# Altium PCB RX.PcbDoc
Units mil, origin at the board's own origin, x right, y up, seen from the top; angles counter-clockwise.
Board outline 1590 x 1730 mil, 4 copper layers (Top Layer, Internal Plane 1, Signal Layer 1, Bottom Layer), stack 67.21 mil thick; 111 components, 68 nets, 346 pads, 138 vias.
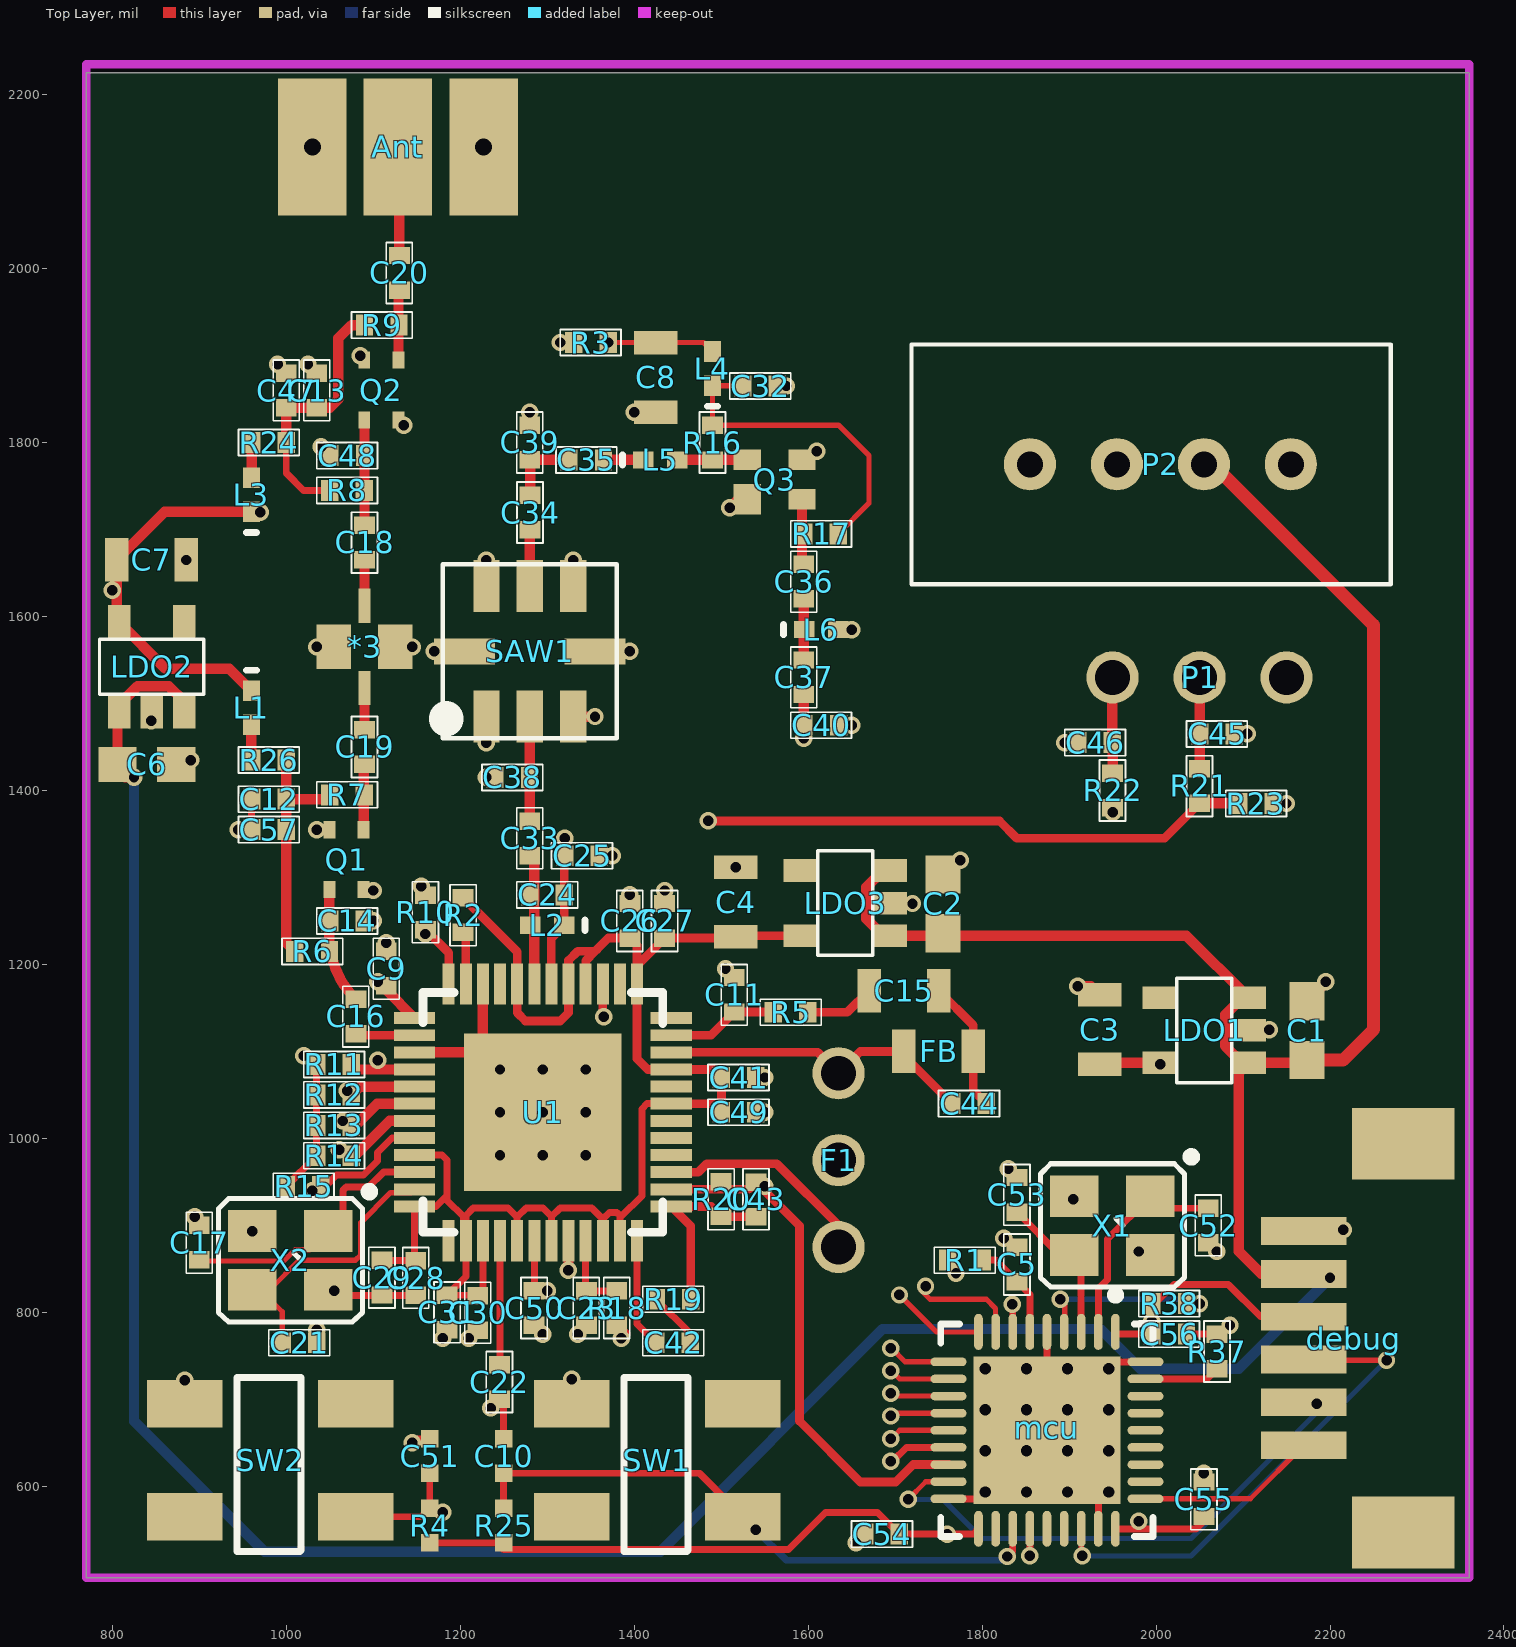
[diagram p0: Top Layer view]
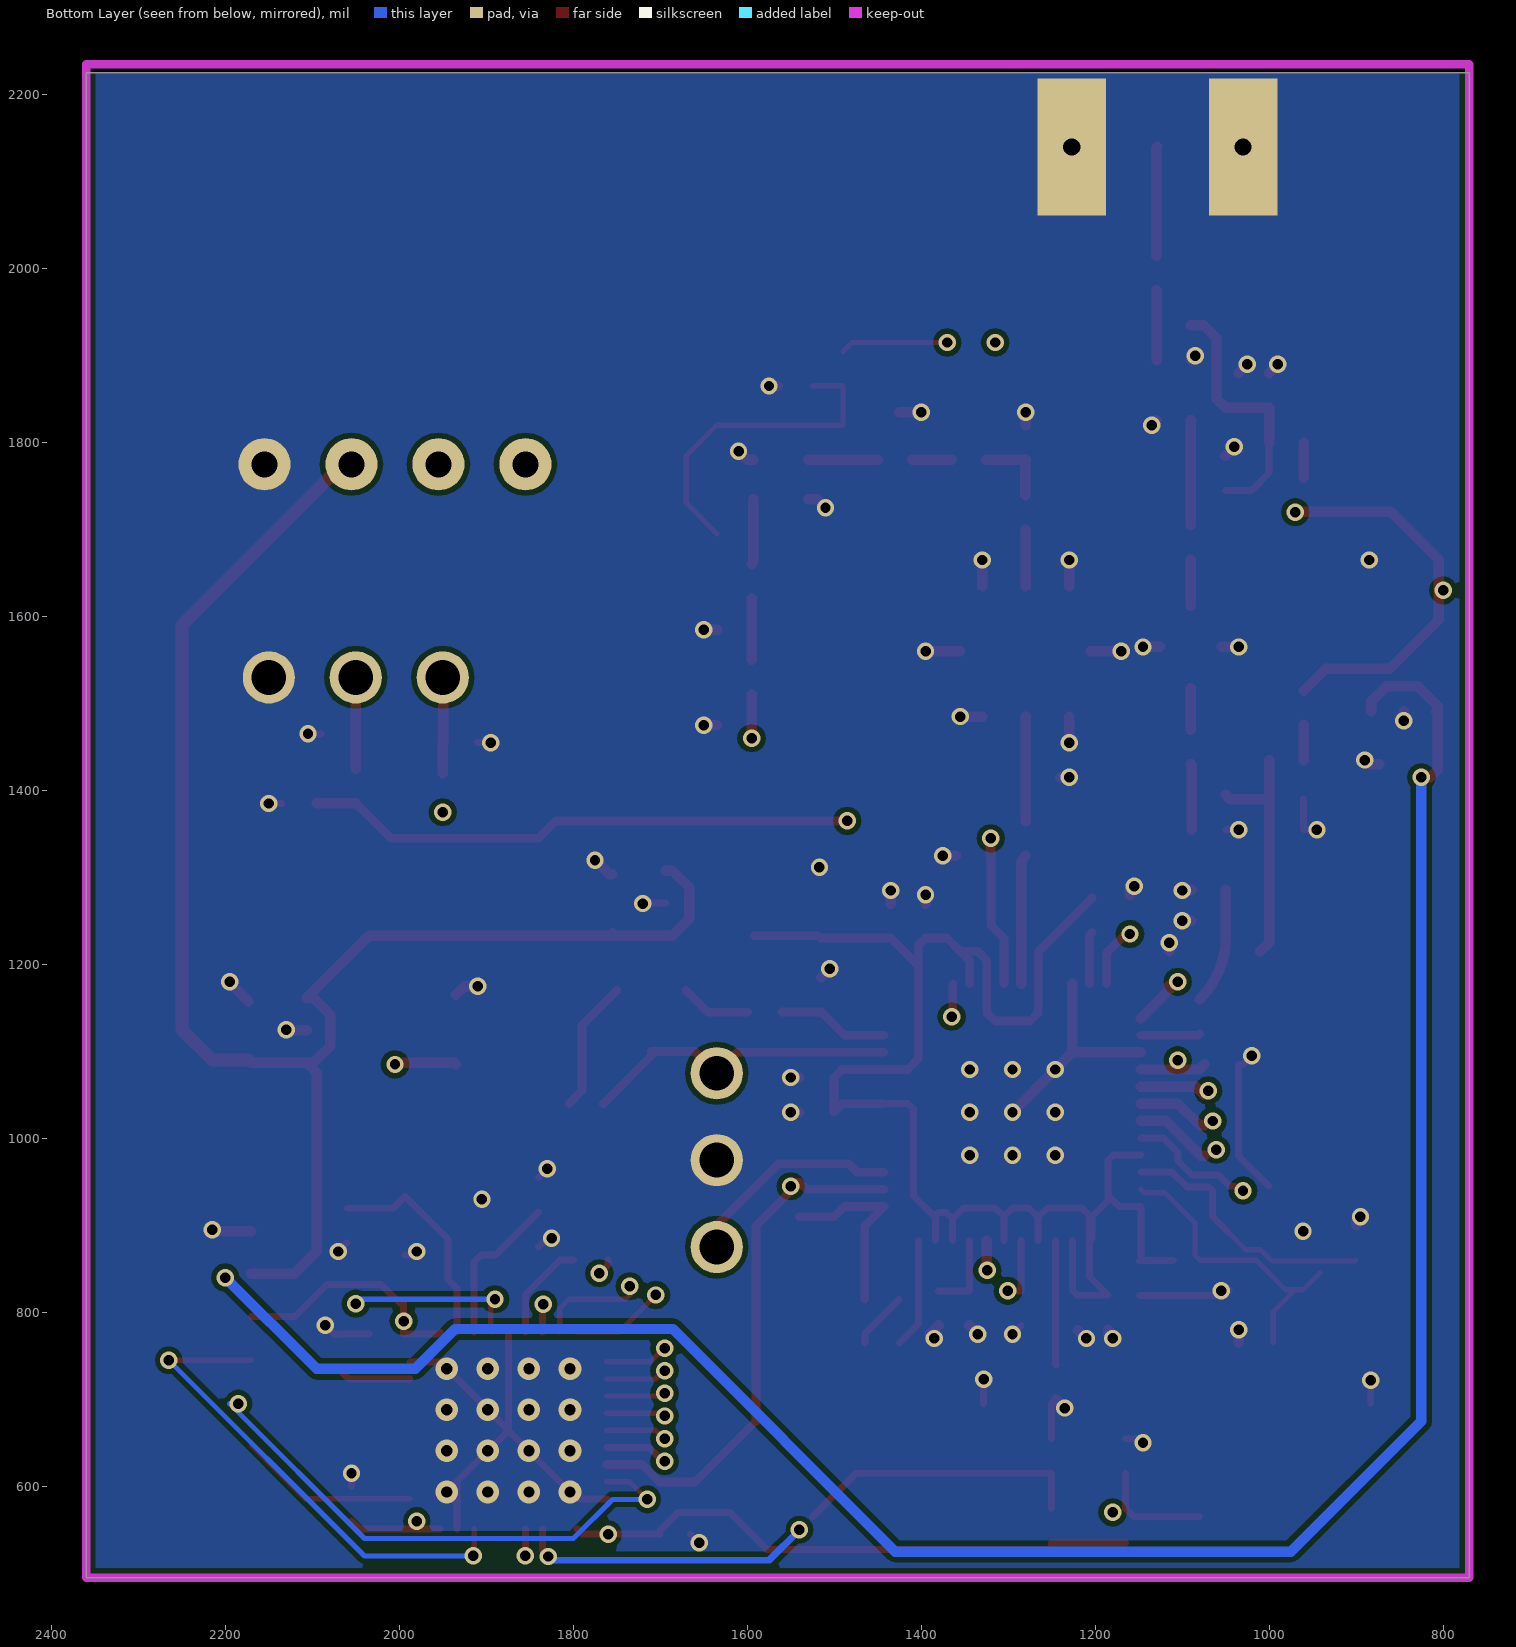
[diagram p1: Bottom Layer view, seen from below]
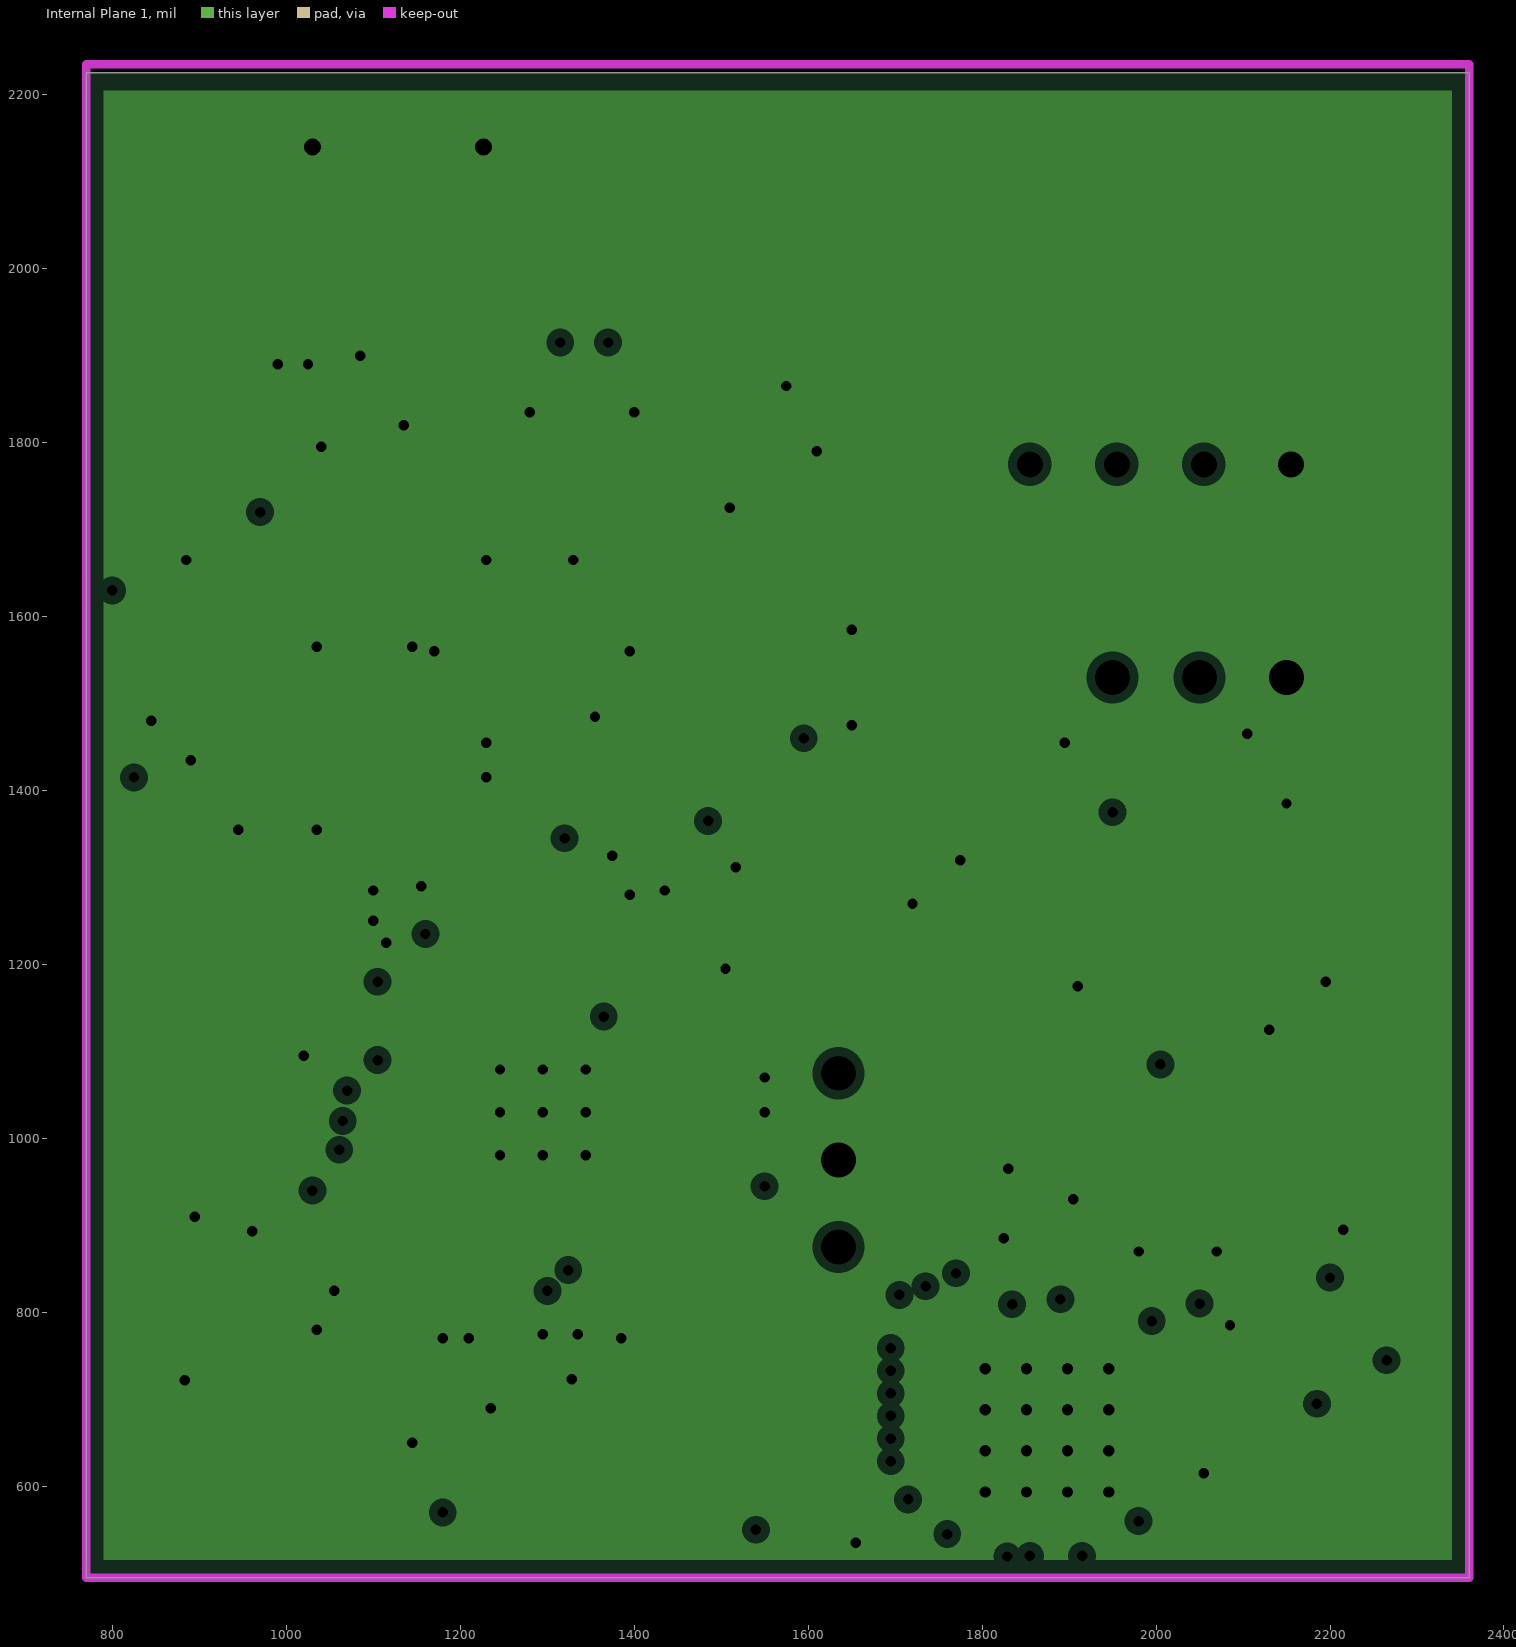
[diagram p2: Internal Plane 1, clearances drawn from the general rule]
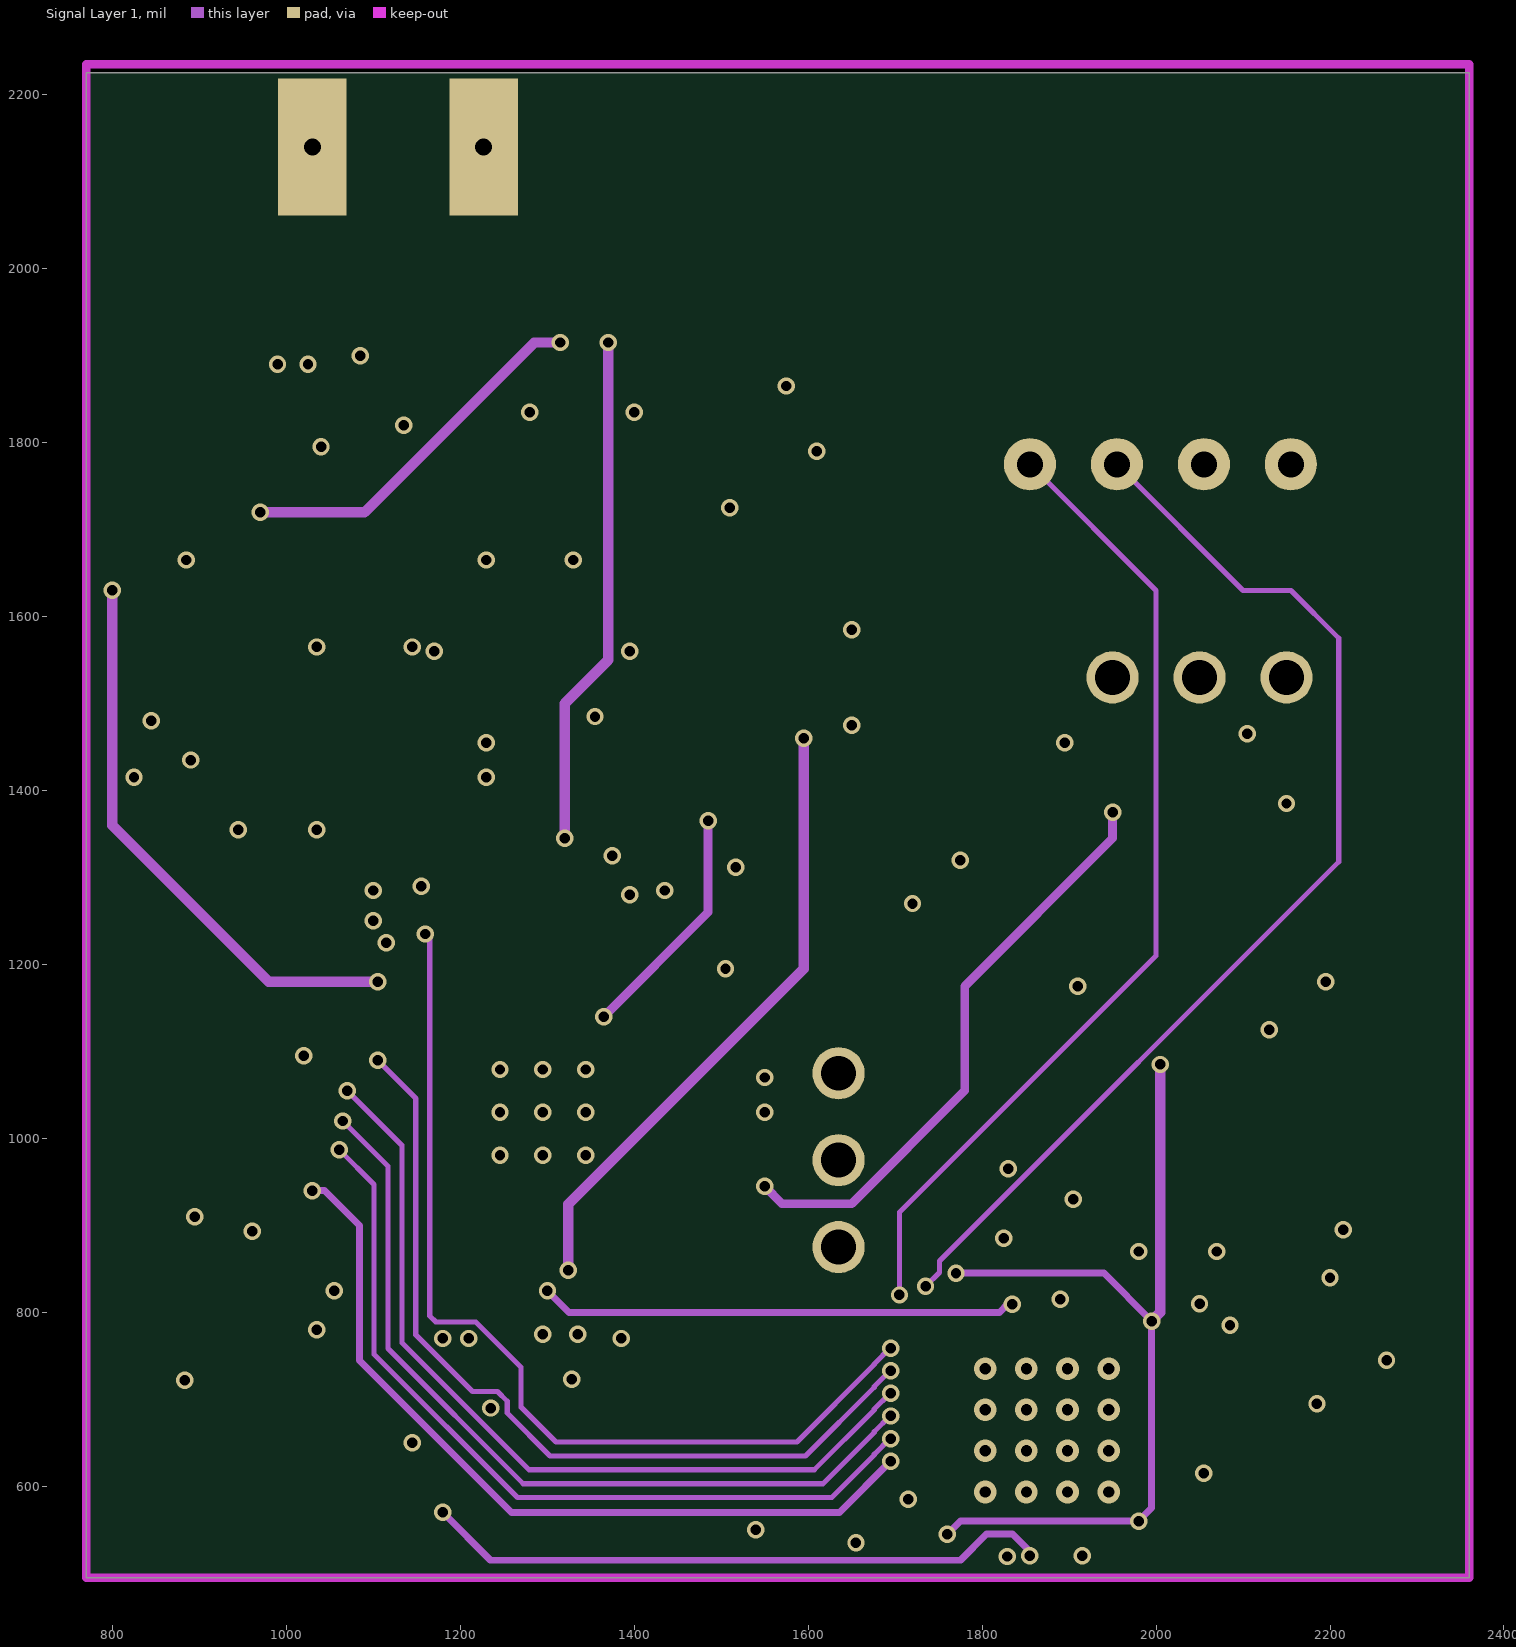
[diagram p3: Signal Layer 1]

## Layer stack, top to bottom
Top Solder: solder mask 0.4, Solder Resist, Dk 3.5
Top Layer: signal copper 1.4
Dielectric 1: core 7.874, FR-4, Dk 4.2
Internal Plane 1: plane copper 0.7087, net GND
Dielectric 3: core 47.2441, Dk 4.2
Signal Layer 1: signal copper 0.7087
Dielectric 2: core 7.874, Dk 4.2
Bottom Layer: signal copper 1.4
Bottom Solder: solder mask 0.4, Solder Resist, Dk 3.5

## Board outline
770,495 2360,495 2360,2225 770,2225

## Design rules (kind name [scope] priority, off if disabled: settings)
Clearance [All] p1: gap=6
MinimumSolderMaskSliver [All] p1 off: minsoldermaskwidth=10
PlaneClearance [All] p1: clearance=10
PlaneConnect [All] p1: planeconnectstyle=Direct reliefexpansion=20 reliefentries=4 reliefconductorwidth=10 reliefairgap=10
PolygonConnect [All] p1: connectstyle=Direct reliefconductorwidth=10 reliefentries=4 polygonreliefangle="90 Angle" airgapwidth=10
RoomDefinition RX [InComponentClass('RX')] p1 off: confinementstyle=ConfineIn formatcopy=TRUE lockcomponents=FALSE outline 4405,45 3550,45 3550,674.44 4405,674.44
RoutingVias [All] p1: holewidth=12 width=20 viastyle="Through Hole" minholewidth=12 minwidth=20 maxholewidth=28 maxwidth=50
SilkToBoardRegionClearance [All] p1 off:
SilkToSilkClearance [All] p1 off: silktosilkclearance=10
SilkToSolderMaskClearance [IsPad] p1 off: minsilkscreentomaskgap=10 clearancetoexposedcopper=TRUE
SolderMaskExpansion [All] p1: expansion=4
UnpouredPolygon [All] p1: allowunpoured=FALSE
Width [All] p1: maxlimit=60 minlimit=6 preferedwidth=10
23 further rules are at their usual default settings.

## Components (designator, comment, footprint, x,y, rotation, side; value= is the part's Value field where it differs from the comment)
*3 "BF2012" BF2012 1090,1565 r270 top
Ant "Antenna" SMA 1030,2140 r0 top
C1 "2.2uF" 0603 2173.54,1124.17 r270 top
C2 "2.2uF" 0603 1755,1270 r270 top
C3 "4.7uF" 0805 1935,1125 r270 top
C4 "4.7uF" 0805 1516.96,1271.56 r270 top
C5 "Cap" 0402#1 1840,855 r90 top
C6 "2.2uF" 0603 840,1430 r180 top
C7 "4.7uF" 0805 845,1665 r180 top
C8 "4.7uF" 0805 1425,1875 r90 top
C9 "0.1uF" 0402#1 1115,1195 r90 top
C10 "1nF" 0402#2 1250,635 r270 top
C11 "27pF" 0402#1 1515,1165 r90 top
C12 "10pF" 0402#1 980,1390 r0 top
C13 "10pF" 0402#1 1035,1860 r270 top
C14 "1pF" 0402#1 1070,1250 r180 top
C15 "TBD" 0805 1710,1170 r180 top
C16 "1pF" 0402#1 1080,1140 r90 top
C17 "Cap" 0402#1 900,880 r90 top
C18 "1pF" 0402#1 1090,1685 r90 top
C19 "0.5pF" 0402#1 1090,1450 r90 top
C20 "0.5pF" 0402#1 1130,1995 r90 top
C21 "Cap" 0402#1 1015,765 r0 top
C22 "Cap" 0402#1 1245,720 r270 top
C23 "Cap" 0402#1 1345,805 r270 top
C24 "1pF" 0402#1 1300,1280 r180 top
C25 "47pF" 0402#1 1340,1325 r0 top
C26 "10nF" 0402#1 1395,1250 r90 top
C27 "0.1uF" 0402#1 1435,1250 r90 top
C28 "Cap" 0402#1 1148.95,839.57 r270 top
C29 "Cap" 0402#1 1110,840 r270 top
C30 "0.1uF" 0402#1 1220.18,799.57 r270 top
C31 "10nF" 0402#1 1185,800 r270 top
C32 "100pF" 0402#1 1545,1865 r180 top
C33 "0R/TBD" 0402#1 1280,1345 r270 top
C34 "0R/TBD" 0402#1 1280.29,1719.57 r270 top
C35 "6.8pF" 0402#1 1345,1780 r180 top
C36 "100pF" 0402#1 1595,1640 r90 top
C37 "8pF" 0402#1 1595,1530 r90 top
C38 "NC/TBD" 0402#1 1260,1415 r180 top
C39 "NC/TBD" 0402#1 1280,1800 r90 top
C40 "?pF" 0402#1 1615,1475 r0 top
C41 "0.1uF" 0402#1 1520,1070 r0 top
C42 "TBD" 0402#1 1445,765 r180 top
C43 "TBD" 0402#1 1540,930 r270 top
C44 "TBD" 0402#1 1785,1040 r0 top
C45 "27pF/NC" 0402#1 2070,1465 r0 top
C46 "NC/TBD" 0402#1 1930,1455 r180 top
C47 "1nF" 0402#1 1000,1860 r270 top
C48 "1pF" 0402#1 1070,1785 r0 top
C49 "0.1uF" 0402#1 1520,1030 r0 top
C50 "Cap" 0402#1 1285,805 r270 top
C51 "1nF" 0402#2 1165,635 r270 top
C52 "Cap" 0402#1 2060,900 r270 top
C53 "Cap" 0402#1 1840,935 r90 top
C54 "Cap" 0402#1 1685,545 r180 top
C55 "Cap" 0402#1 2055,585 r90 top
C56 "Cap" 0402#1 2015,775 r0 top
C57 "1nF" 0402#1 980,1355 r0 top
debug "debug" WFRSM125 2170,795 r90 top
F1 "6M/6.5M_Audio_filter" 3p 1635,1075 r270 top
FB "TBD" 0805 1750,1100 r180 top
L1 "10nH" 0402-A 960,1495 r270 top
L2 "10nH" 0402-A 1300,1245 r180 top
L3 "10nH" 0402-A 960,1740 r90 top
L4 "RFchoke" 0402-A 1490,1885 r90 top
L5 "39nH" 0402-A 1430,1780 r0 top
L6 "18nH" 0402-A 1615,1585 r0 top
LDO1 "RT9193-33" SOT23-5 2055.43,1124.17 r90 top
LDO2 "LP5907" SOT23-5 845.26,1542.31 r0 top
LDO3 "LP5907/RT9013" SOT23-5 1642.69,1270.54 r90 top
mcu "STM32F103T8U6" VFQN36_N 1874.61,664.37 r270 top
P1 "3P" 3p 1950,1530 r0 top
P2 "4PSocket" 4pSocket 1955,1775 r0 top
Q1 "NPN" NESG3031M05 1030,1345 r270 top
Q2 "NPN" NESG3031M05 1070,1885 r270 top
Q3 "RF_BJT" SOT343-4(RF) 1530,1780 r270 top
R1 "0R" 0402#1 1780,860 r0 top
R2 "NC/0R" 0402#1 1203.35,1256.59 r90 top
R3 "FB" 0402#1 1350,1915 r0 top
R4 "510R" 0402#2 1165,555 r270 top
R5 "2k" 0402#1 1580,1145 r180 top
R6 "68R" 0402#1 1030,1215 r180 top
R7 "39k" 0402#1 1070,1395 r180 top
R8 "68R" 0402#1 1070,1745 r180 top
R9 "39k" 0402#1 1110,1935 r180 top
R10 "10k" 0402#1 1160,1260 r270 top
R11 "10k" 0402#1 1055,1085 r180 top
R12 "10k" 0402#1 1055,1050 r180 top
R13 "10k" 0402#1 1055,1015 r180 top
R14 "10k" 0402#1 1055,980 r180 top
R15 "10k" 0402#1 1020,945 r180 top
R16 "33k" 0402#1 1490,1800 r270 top
R17 "100R" 0402#1 1615,1695 r180 top
R18 "12k" 0402#1 1380,805 r270 top
R19 "0R/TBD" 0402#1 1445,815 r0 top
R20 "0R/TBD" 0402#1 1500,930 r90 top
R21 "10R" 0402#1 2050,1405 r90 top
R22 "0R/TBD" 0402#1 1950,1400 r90 top
R23 "75R" 0402#1 2115,1385 r180 top
R24 "510R" 0402#1 980,1800 r0 top
R25 "510R" 0402#2 1250,555 r270 top
R26 "510R" 0402#1 980,1435 r0 top
R37 "Res2" 0402#1 2070,755 r270 top
R38 "Res2" 0402#1 2015,810 r0 top
SAW1 "NDF4010" QCC-8 1280,1560 r90 top
SW1 "SW-PB" SW1 1525,565 r180 top
SW2 "SW-PB" SW1 1080,565 r180 top
U1 "RTC6715" RTC6715 1295,1030 r0 top
X1 "24.000 KHz 3.2x2.5mm 8-10pf" OSCILLATOR-3.2X2.5 1950,900 r180 top
X2 "24.000 KHz 3.2x2.5mm 8-10pf" OSCILLATOR-3.2X2.5 1005,860 r180 top

## Footprints (in the part's own frame and the unit in brackets; to place one, negate y for a bottom-side part, rotate by r counter-clockwise, add the part's x,y. Pads: shape width x height; smd on the part's side, far side on the other; paste and mask are expansions set on the pad)
3p [mil]
  round 60 hole 40: 1(0,0) 2(100,0) 3(200,0)
4pSocket [mil]
  round 60 hole 30: 1(-100,0) 2(0,0) 3(100,0) 4(200,0)
  silkscreen extent -236,-138 315,138
0402#1 [mil] "0402-CAP"
  rect 20x24 smd: 1(20,0) 2(-19.69,0)
  silkscreen extent -35,-15 35,15
0402#2 [mil] "0402-RES"
  rect 20x20 smd: 1(-19.69,0) 2(20,0)
0402-A [mm] "Chip Inductor, Body 1.0x0.5mm, IPC High Density"
  rect 0.6x0.5 smd: 1(-0.5,0) 2(0.5,0)
  silkscreen extent -1.1,-0.15 -1.1,0.15, body extent -0.55,-0.3 0.55,0.3, height 0.55
0603 [mil] "0603"
  rect 44x40 smd: 1(-33.46,0) 2(34,0)
0805 [mil]
  rect 27x50 smd: 1(-40,0) 2(40,0)
  body extent -50,-30 50,30, height 31
BF2012 [mm]
  rect 1.3x1 smd: 0(0,0.9) 0(0,-0.9)
  rect 1x0.35 smd: 1(-1.2,0) 2(1.2,0)
NESG3031M05 [mm]
  rect 0.5x0.35 smd: 1(-0.25,1.5) 2(-0.25,0.5) 2(1.5,1.5) 3(1.5,0.5)
  body extent 0,0 1.25,2, height 0.6
OSCILLATOR-3.2X2.5 [mil] "OSCILLATOR-3.2X2.5"
  rect 56x48 smd: 1(-43.31,-33.46) 2(44,-33.46) 3(44,34) 4(-43.31,34)
  silkscreen extent -95,-83 83,71
QCC-8 [mil]
  rect 60x30 smd: 1(-75,50) 2(-75,0) 3(-75,-50) 5(75,-50) 6(75,0) 7(75,50)
  rect 30x70 smd: 4(0,-75) 8(0,75)
  silkscreen extent -100,-100 100,100, body extent -100,-100 100,100, height 80
RTC6715 [mm]
  rect 4.6x4.6 smd: 0(0,0)
  rect 1.2x0.35 smd: 1(-3.75,2.75) 2(-3.75,2.25) 3(-3.75,1.75) 4(-3.75,1.25) 5(-3.75,0.75) 6(-3.75,0.25) 7(-3.75,-0.25) 8(-3.75,-0.75) 9(-3.75,-1.25) 10(-3.75,-1.75) 11(-3.75,-2.25) 12(-3.75,-2.75) 25(3.75,-2.75) 26(3.75,-2.25) 27(3.75,-1.75) 28(3.75,-1.25) 29(3.75,-0.75) 30(3.75,-0.25) 31(3.75,0.25) 32(3.75,0.75) 33(3.75,1.25) 34(3.75,1.75) 35(3.75,2.25) 36(3.75,2.75)
  rect 0.35x1.2 smd: 13(-2.75,-3.75) 14(-2.25,-3.75) 15(-1.75,-3.75) 16(-1.25,-3.75) 17(-0.75,-3.75) 18(-0.25,-3.75) 19(0.25,-3.75) 20(0.75,-3.75) 21(1.25,-3.75) 22(1.75,-3.75) 23(2.25,-3.75) 24(2.75,-3.75) 37(2.75,3.75) 38(2.25,3.75) 39(1.75,3.75) 40(1.25,3.75) 41(0.75,3.75) 42(0.25,3.75) 43(-0.25,3.75) 44(-0.75,3.75) 45(-1.25,3.75) 46(-1.75,3.75) 47(-2.25,3.75) 48(-2.75,3.75)
  silkscreen extent -3.5,-3.5 3.5,3.5, body extent -3.5,-3.5 3.5,3.5, height 0.9
SMA [mm]
  rect 2x4 smd: 1(2.5,0)
  rect 2x4 hole 0.5: GND(0,0) GND(5,0)
SOT23-5 [mil]
  rect 26x40 smd: 1(-37.4,-51) 2(0,-51) 3(37.4,-51) 4(37.4,51) 5(-37.4,51)
  silkscreen extent -60,-32 60,32
SOT343-4(RF) [mm]
  rect 0.6x0.8 smd: 1(0,0) 3(1.15,1.6) 4(0,1.6)
  rect 0.9x0.8 smd: 2(1.15,0)
SW1 [mm]
  rect 2.2x1.4 smd: 1(0,0) 2(5,-3.3) 3(5,0) 4(0,-3.3)
  silkscreen extent 1.6,-4.06 3.47,1.02
VFQN36_N [mm]
  rect 4.3x4.3 smd: 0(0,0)
  oval 1.05x0.25 smd: 1(-2.875,2) 2(-2.875,1.5) 3(-2.875,1) 4(-2.875,0.5) 5(-2.875,0) 6(-2.875,-0.5) 7(-2.875,-1) 8(-2.875,-1.5) 9(-2.875,-2) 19(2.875,-2) 20(2.875,-1.5) 21(2.875,-1) 22(2.875,-0.5) 23(2.875,0) 24(2.875,0.5) 25(2.875,1) 26(2.875,1.5) 27(2.875,2)
  oval 0.25x1.05 smd: 10(-2,-2.875) 11(-1.5,-2.875) 12(-1,-2.875) 13(-0.5,-2.875) 14(0,-2.875) 15(0.5,-2.875) 16(1,-2.875) 17(1.5,-2.875) 18(2,-2.875) 28(2,2.875) 29(1.5,2.875) 30(1,2.875) 31(0.5,2.875) 32(0,2.875) 33(-0.5,2.875) 34(-1,2.875) 35(-1.5,2.875) 36(-2,2.875)
  silkscreen extent -4.07,-3.1 3.1,3.1
WFRSM125 [mm]
  rect 0.81x2.5 smd: 1(-3.75,0) 2(-2.5,0) 3(-1.25,0) 4(0,0) 5(1.25,0) 6(2.5,0)
  rect 2.1x3 smd: shell(-6.3,-2.9) shell(5.05,-2.9)
  body extent -6.79,-3.82 5.46,0.38, height 3.4

## Part data
C1 C2 C3 C4 C6 C7 C8 C9 C10 C11 C12 C13 C14 C15 C16 C18 C19 C20 C24 C25 C26 C27 C30 C31 C32 C33 C34 C35 C36 C37 C38 C39 C40 C41 C42 C43 C44 C45 C46 C47 C48 C49 C51 C57: library part Cap, "Capacitor"
C5 C17 C21 C22 C23 C28 C29 C50 C52 C53 C54 C55 C56: "Capacitor"
FB R1 R2 R3 R4 R5 R6 R7 R8 R9 R10 R11 R12 R13 R14 R15 R16 R17 R18 R19 R20 R21 R22 R23 R24 R25 R26: library part Res2, "Resistor"
L1 L2 L3 L4 L5 L6: library part Inductor, "Inductor"
LDO1 LDO3: library part LP5907
mcu: "STM32 ARM-based 32-bit MCU with 64 Kbytes Flash, 36-pin VFQFPN, Industrial Temperature"
Q1 Q2: "NPN Bipolar Transistor"
R37 R38: "Resistor"
SW1 SW2: "Switch"
X1 X2: library part OSCILLATOR-3.2X2.5, "Crystal Oscillator in 3.2x2.5 SMD"

## Via types
v1: diameter 20, hole 12, Top Layer to Bottom Layer, 122 vias
v2: diameter 25.98, hole 12.99, Top Layer to Bottom Layer, tented both sides, 16 vias

## Nets (pads, with @x,y where several pads share a name; then routed paths per layer and width w, separated by ;. In a path a pad name is that pad's centre, name@x,y a point inside that pad or via, vN(x,y) a via of type N, cw(c..) or ccw(c..) an arc to the next point about the centre after c; other vN are vias at no path point)
3.3A: C4.2 C26.2 C27.2 C28.2 C29.2 C30.2 C31.2 C41.2 C49.2 LDO3.5 R2.1 U1.9 U1.12 U1.14 U1.15 U1.17 U1.19 U1.22 U1.23 U1.31 U1.33 U1.37 U1.40 U1.41 U1.44 | length 1938.9
  Top Layer w8: C29.2 C28.2@1148.53,859.69 ; U1.9 1179.21,980.79 1185,975 1185,934.4 ; C28.2 C28.2@1148.53,859.69 ; U1.15 1226.1,825.19 C30.2 1219.75,819.69 C31.2 1206.42,841.1 U1.14 ; U1.17 1265.47,909.53 ; U1.19 1304.84,909.84 1305,910 ; U1.22 1363.9,907.33 ; U1.23 1383.58,908.58 1385,910 ; U1.31 1442.48,1040 1415,1040 1409.02,1034.02 1409.02,934.02 1385,910 ; C28.2@1148.53,859.69 1147.36,860.85 U1.12 1172.33,921.73 1185,934.4 ; 1185,934.4 1185,928.75 1203.62,910.13 1203.62,885.16 U1.14 ; U1.14 1206.42,911.42 1215,920 1255,920 1265.47,909.53 ; 1265.47,909.53 1275.94,920 1295,920 1305,910 ; 1305,910 1315,920 1351.23,920 1363.9,907.33 ; 1363.9,907.33 1371.57,915 1380,915 1385,910
  Top Layer w10: R2.1 1265.47,1214.47 U1.44 1265.47,1144.53 1275,1135 1315,1135 1324.53,1144.53 U1.41 1324.53,1204.53 1335,1215 1355,1215 ; U1.40 1344.21,1204.21 1355,1215 ; 1357.26,1217.26 1355,1215 ; U1.31 1490.47,1039.84 C49.2 C41.2 1491.1,1079.21 U1.33 1415.79,1079.21 1403.27,1091.73 U1.37 U1.37@1403.27,1198.58 ; LDO3.5 1518.54,1233.14 C4.2 1515.72,1230.31 C27.2 U1.37@1403.27,1198.58 ; 1355,1215 1370.31,1230.31 C26.2 1403.27,1222.05 U1.37@1403.27,1198.58
3.3D: C3.2 C54.2 C55.2 C56.2 debug.4 LDO1.5 mcu.1 mcu.19 mcu.27 R1.2 R4.2 R25.2 R38.2 | length 2156.6
  Top Layer w8: R4.2 R25.2 1250,527.44 1577.44,527.44 1620,570 1679.69,570 C54.2@1704.37,545.31 ; C54.2@1700,545.31 C54.2@1704.37,545.31 ; C54.2 C54.2@1704.37,545.31 ; R1.2 1760.31,854.69 v1(1770,845) ; mcu.19 1790,545.31 C54.2@1704.37,545.31 ; mcu.27 2045.87,551.18 C55.2@2055,560.31 ; mcu.1 1955.91,775 C56.2 R38.2 1998.86,810 2020.86,832 2083,832 2120,795 debug.4
  Top Layer w12: C3.2 1936.77,1086.77 LDO1.5 2004.43,1085.57 v1(2005,1085)
  Signal Layer 1 w8: v1(1760,545) 1775,560 v1(1980,560) 1995,575 v1(1995,790) 1940,845 v1(1770,845)
  Signal Layer 1 w12: v1(1995,790) 2005,800 v1(2005,1085)
3.3IF: C8.2 C24.2 C25.2 L2.1 L4.2 R3.1 U1.42 | length 888.9
  Top Layer w6: v1(1370,1915) C8.2 1479.69,1915 L4.2
  Top Layer w10: U1.42 1304.84,1230.16 L2.1 C24.2 1319.69,1324.37 C25.2
  Top Layer w12: v1(1320,1345) 1320.31,1344.69 C25.2
  Signal Layer 1 w12: v1(1320,1345) 1320,1500 1370,1550 v1(1370,1915)
3.3RF: C7.2 C9.2 L1.1 L3.1 LDO2.5 R3.2 U1.1 | length 1583.3
  Top Layer w12: L1.1 934.69,1540 861.18,1540 LDO2.5 805,1596.18 C7.2 860.32,1720.31 L3.1 969.69,1720.31 v1(970,1720) ; v1(1105,1180) 1109.69,1175.31 C9.2 1115,1170.63 U1.1
  Signal Layer 1 w12: v1(800,1630) 800,1360 980,1180 v1(1105,1180) ; v1(970,1720) 1090,1720 1285,1915 v1(1315,1915)
5V: C1.2 C2.2 C6.2 debug.5 LDO1.1 LDO1.3 LDO2.1 LDO2.3 LDO3.1 LDO3.3 P2.3 | length 4410.3
  Top Layer w12: LDO2.1 LDO2.1@806,1489.45 ; v1(825,1415) 815,1415 806,1424 C6.2 LDO2.1@806,1489.45 ; LDO2.3 882.66,1502.34 865,1520 828.98,1520 806,1497.02 LDO2.1@806,1489.45 ; LDO3.3 1686.11,1307.94 1666.69,1288.51 1666.69,1252.57 1686.11,1233.14 LDO3.1 C2.2@1752.14,1233.14 ; C2.2 C2.2@1752.14,1233.14 ; debug.5 2120.79,844.21 2095,870 2095,1075.34 LDO1.1 ; C1.2 2170.14,1086.77 LDO1.1 ; C2.2@1752.14,1233.14 2034.87,1233.14 LDO1.3 2098.86,1161.57 2079.43,1142.14 2079.43,1106.2 2098.86,1086.77 LDO1.1
  Top Layer w15: P2.3 2065,1775 2250,1590 2250,1125 2215.17,1090.17 C1.2
  Bottom Layer w12: v1(825,1415) 825,675 975,525 1429.99,525 1685.89,780.9 1935.9,780.9 1981.8,735 2095,735 v1(2200,840)
AIN6: C43.1 R19.1 R20.2 U1.25 | length 218.2
  Top Layer w10: R19.1 1465,899.37 U1.25 1488.58,921.73 R20.2 1500.31,910 C43.1
AIN65: U1.29
AOUT6: C43.2 mcu.16 R20.1 R22.2 U1.26 | length 1299.4
  Top Layer w10: U1.26 1531.73,941.42 C43.2 ; v1(1550,945) 1545.31,949.69 C43.2 ; mcu.16 1720.8,625 1700.8,605 1660,605 1590,675 1590,899.69 C43.2
  Signal Layer 1 w10: v1(1550,945) 1570,925 1650,925 1780,1055 1780,1175 1950,1345 v1(1950,1375)
AOUT65: U1.28
BBOUT: C44.2 F1.1 FB.2 U1.34 | length 370.5
  Top Layer w10: U1.34 1611.1,1098.9 F1.1 1660,1100 FB.2 1710,1095.31 C44.2
BX: mcu.15 R15.2 U1.8 | length 1142.8
  Top Layer w8: R15.2 1045,945 1058,958 1088.83,958 1105,974.17 1105,983.72 1121.76,1000.47 U1.8 ; v1(1695,628.9) 1697.28,628.9 1713.07,644.69 mcu.15
  Signal Layer 1 w8: v1(1030,940) 1044,940 1084,900 1084,744.83 1258.83,570 1636.1,570 v1(1695,628.9)
FM6: F1.3 U1.27 | length 250.9
  Top Layer w10: U1.27 1473.55,961.1 1483.44,971 1564,971 1635,900 F1.3
FM65: U1.32
GND: *3.0 Ant.GND C1.1 C2.1 C3.1 C4.1 C5.1 C6.1 C7.1 C8.1 C9.1 C10.1 C11.1 C12.2 C13.2 C14.2 C17.1 C21.1 C22.1 C23.1 C25.1 C26.1 C27.1 C28.1 C29.1 C30.1 C31.1 C32.2 C38.1 C39.1 C40.1 C41.1 C45.1 C46.1 C47.2 C48.2 C49.1 C50.1 C51.1 C52.1 C53.1 C54.1 C55.1 C56.1 C57.2 debug.6 F1.2 L6.2 LDO1.2 LDO2.2 LDO3.2 mcu.0 mcu.5 mcu.18 mcu.26 mcu.36 P1.3 P2.4 Q1.2 Q2.2 Q3.2 Q3.4 R10.2 R11.1 R12.1 R13.1 R14.1 R15.1 R18.1 R23.2 R37.2 SAW1.1 SAW1.3 SAW1.4 SAW1.5 SAW1.7 SAW1.8 SW1.2 SW2.2 U1.0 U1.3 U1.46 X1.2 X1.4 X2.2 X2.4 | length 2328.9
  Top Layer w8: SW2.2 v1(883.15,721.85) ; v1(945,1355) C57.2 C12.2 ; R15.1 R14.1 R13.1 R12.1 R11.1 1030,1085 v1(1020,1095) ; v1(1035,1355) 1049.53,1355 Q1.2@1049.69,1354.84 ; X2.4@1054,826 v1(1055,825) 1060.42,819.58 C28.1 ; v1(1145,650) 1149.69,654.69 C51.1 ; C10.1 C22.1@1250,695 ; C50.1 v1(1295,775) ; SW1.2 v1(1328.15,723.15) ; v1(1655,535) C54.1 ; LDO3.2 1719.46,1270.54 v1(1720,1270) ; mcu.18 1795.87,585.63 v2(1803.74,593.5) v2(1850.98,640.75) mcu.0 ; v1(1825,885) 1825,887.66 1826.17,888.83 C5.1 ; v1(1830,965) C53.1 ; mcu.5 mcu.0 ; v1(1895,1455) C46.1 ; v1(1905,930) 1906,931 X1.2 ; mcu.26 1933.66,605.31 mcu.0 ; v1(1980,870) 1984,866 X1.4 ; mcu.36 1953.35,743.11 v2(1945.47,735.24) v2(1898.23,687.99) mcu.0 ; C56.1 2069.69,775 R37.2 2074.69,774.69 v1(2085,785) ; C55.1@2055,600 v1(2055,615) ; C52.1 v1(2070,870) ; C45.1 v1(2105,1465) ; R23.2 v1(2150,1385)
  Top Layer w12: v1(845,1480) 845.26,1480.27 LDO2.2 ; C6.1 885,1430 v1(890,1435) ; v1(895,910) 900,905 C17.1 ; v1(990,1890) 1000,1880 C47.2 ; v1(1025,1890) 1035,1880 C13.2 ; C21.1 v1(1035,780) ; v1(1035,1565) *3.0@1054.57,1565 ; v1(1040,1795) 1050,1785 C48.2 ; X2.4 X2.4@1054,826 ; v1(1085,1900) 1085,1899.53 Q2.2@1089.69,1894.84 ; Q1.2@1089.06,1285.94 1090,1285 v1(1100,1285) ; C14.2 v1(1100,1250) ; C9.1 v1(1115,1225) ; *3.0@1125.43,1565 v1(1145,1565) ; Q2.2@1129.06,1825.94 v1(1135,1820) ; U1.3 U1.0@1226.1,1098.9 ; v1(1155,1290) 1160,1285 R10.2 ; v1(1170,1560) SAW1.8 ; v1(1180,770) 1185,775 C31.1 ; v1(1210,770) 1210.6,770 C30.1 ; U1.46 U1.0@1226.1,1098.9 ; v1(1230,1415) C38.1 ; v1(1230,1455) SAW1.1 ; SAW1.7 v1(1230,1665) ; v1(1235,690) C22.1 ; C39.1 v1(1280,1835) ; v1(1295,1030) v1(1245.79,1079.21) U1.0@1226.1,1098.9 ; SAW1.3 v1(1355,1485) ; SAW1.5 v1(1330,1665) ; v1(1335,775) C23.1 ; SAW1.4 v1(1395,1560) ; C25.1 v1(1375,1325) ; R18.1 1390,775 v1(1385,770) ; C26.1 v1(1395,1280) ; v1(1400,1835) C8.1 ; C27.1 v1(1435,1285) ; v1(1505,1195) C11.1 ; v1(1510,1725) 1519.72,1734.72 Q3.2 ; C49.1 v1(1550,1030) ; C41.1 v1(1550,1070) ; C32.2 v1(1575,1865) ; Q3.4 1600,1780 v1(1610,1790) ; L6.2 v1(1650,1585) ; C40.1 v1(1650,1475) ; C2.1 1758.46,1303.46 v1(1775,1320) ; v1(1910,1175) 1925,1175 C3.1 ; LDO1.2 2129.17,1124.17 v1(2130,1125) ; debug.6 2213.43,893.43 v1(2215,895) ; C1.1 2195,1179.09 v1(2195,1180)
  other v1: 961,893.46 1245.79,980.79 1295,980.79 1344.21,980.79 1245.79,1030 1344.21,1030 1295,1079.21 1344.21,1079.21 1516.96,1311.56 885,1665
  other v2: 1850.98,593.5 1898.23,593.5 1945.47,593.5 1803.74,640.75 1898.23,640.75 1945.47,640.75 1803.74,687.99 1850.98,687.99 1945.47,687.99 1803.74,735.24 1850.98,735.24 1898.23,735.24
IFIN: C37.2 C40.2 U1.20 | length 808.2
  Top Layer w12: v1(1324.21,848.59) 1324.53,848.91 U1.20 ; v1(1595,1460) C40.2@1595,1475.31 ; C37.2 C40.2@1595,1475.31 ; C40.2 C40.2@1595,1475.31
  Signal Layer 1 w12: v1(1324.21,848.59) 1324.21,924.21 1595,1195 v1(1595,1460)
MIX_OUT: C24.1 C33.1 L2.2 U1.43 | length 148.7
  Top Layer w12: C33.1 cw(c1267.55,1312.55) 1285.16,1312.55 U1.43
Net*3_1: *3.1 C18.2 | length 53.1
  Top Layer w12: *3.1 C18.2
Net*3_2: *3.2 C19.1 | length 47.8
  Top Layer w12: C19.1 *3.2
NetAnt_1: Ant.1 C20.1 | length 125.4
  Top Layer w12: Ant.1 cw(c1124.62,2136.2) 1130,2136.2 C20.1
NetC5_2: C5.2 mcu.6 R1.1 | length 114.2
  Top Layer w8: R1.1 1815.31,860 C5.2 1854.92,820.39 mcu.6
NetC10_2: C10.2 mcu.21 R25.1 SW1.1 | length 681.8
  Top Layer w8: R25.1 C10.2 1475,615 SW1.1 ; v1(1829,519.3) 1835,525.29 1835,528.28 1835.24,528.52 mcu.21
  Signal Layer 1 w8: v1@1824.71,515 v1(1829,519.3)
  Bottom Layer w8: v1(1540,550) 1575,515 1824.71,515 v1(1829,519.3)
NetC12_1: C12.1 C57.1 R6.1 R7.1 R26.1 | length 276.2
  Top Layer w12: R26.1 C12.1 ; R6.1 1000,1225 C57.1 C12.1 ; R7.1 1045,1390 C12.1
NetC13_1: C13.1 C47.1 R8.1 R9.1 R24.1 | length 303.6
  Top Layer w8: R24.1 1000,1765 1020,1745 R8.1
  Top Layer w12: R24.1 C47.1 C13.1 1050,1840 1060,1850 1060,1920 1075,1935 R9.1
NetC14_1: C14.1 C16.1 Q1.3 R6.2 | length 134.2
  Top Layer w12: Q1.3 1049.69,1231.74 ccw(c1149.69,1231.74) 1078.97,1161.03 C16.1
NetC15_1: C15.1 C44.1 FB.1 | length 152.8
  Top Layer w10: C15.1 1790,1130 FB.1 1790,1055 C44.1
NetC15_2: C15.2 R5.2 | length 80.7
  Top Layer w10: R5.2 1645,1145 C15.2
NetC17_2: C17.2 U1.10 X2.1 | length 307.7
  Top Layer w6: C17.2 901.31,859 997.03,859 1010.03,872 1026.84,872 X2.1
  Top Layer w8: X2.1 1065,910.16 1065,940 1069,944 1094.63,944 1111.73,961.1 U1.10
NetC18_1: C18.1 C48.1 Q2.3 R8.2 | length 121.1
  Top Layer w12: Q2.3 1090,1825.63 C18.1
NetC19_2: C19.2 Q1.1 R7.2 | length 75.7
  Top Layer w12: Q1.1 1089.06,1428.03 cw(c1092.28,1428.03) C19.2
NetC20_2: C20.2 Q2.1 R9.2 | length 80.7
  Top Layer w12: Q2.1 1129.06,1973.03 cw(c1132.28,1973.03) C20.2
NetC21_2: C21.2 U1.11 X2.3 | length 354.8
  Top Layer w6: X2.3@941.69,845.31 X2.3 X2.3@970,826 ; C21.2 995.31,800.69 X2.3@970,826 ; U1.11 1143.57,937.62 1120.01,937.62 1085.31,902.92 1085.31,865.74 1079.57,860 1015,860 981,826 X2.3@970,826
NetC22_2: C22.2 U1.16 | length 143
  Top Layer w8: C22.2 1245.79,740.47 U1.16
NetC23_2: C23.2 R18.2 U1.21 | length 93
  Top Layer w8: U1.21 1344.21,825.47 C23.2 R18.2
NetC32_1: C32.1 L4.1 R16.2 R17.2 | length 380
  Top Layer w6: C32.1 1524.69,1865.31 L4.1 R16.2 1490.31,1820 1635,1820 1670,1785 1670,1730.31 R17.2
NetC33_2: C33.2 C38.2 SAW1.2 | length 120.3
  Top Layer w12: C33.2 SAW1.2
NetC34_1: C34.1 SAW1.6 | length 64.7
  Top Layer w12: SAW1.6 1280,1699.29 C34.1
NetC34_2: C34.2 C35.1 C39.2 | length 85.9
  Top Layer w12: C39.2 C39.2@1280.29,1780.02 ; C34.2 C39.2@1280.29,1780.02 ; C35.1 C39.2@1280.31,1780
NetC35_2: C35.2 L5.1 | length 45.6
  Top Layer w12: C35.2 L5.1
NetC36_1: C36.1 Q3.3 R17.1 | length 75.3
  Top Layer w12: Q3.3 1592.99,1664.85 ccw(c1599.85,1664.85) C36.1
NetC36_2: C36.2 C37.1 L6.1 | length 70.3
  Top Layer w12: C37.1 C36.2
NetC42_2: C42.2 R19.2 | length 66.3
  Top Layer w8: R19.2 1464.69,775.63 C42.2
NetC46_2: C46.2 P1.1 R22.1 | length 110.3
  Top Layer w12: R22.1 1950,1454.69 C46.2 1949.69,1529.69 P1.1
NetC51_2: C51.2 mcu.22 R4.1 SW2.1 | length 884
  Top Layer w8: SW2.1 1155.31,565 R4.1 C51.2 ; mcu.22 1855,551.1 v1(1855,520)
  Signal Layer 1 w8: v1(1180,570) 1235,515 1775,515 1805,545 1835,545 1855,525 v1(1855,520)
NetC52_2: C52.2 mcu.2 X1.1 | length 253
  Top Layer w8: mcu.2 1933.66,827.52 1944,837.86 1944,884.16 X1.1 2007.09,919.69 C52.2
NetC53_2: C53.2 mcu.3 X1.3 | length 178.2
  Top Layer w8: C53.2 1889.31,866 X1.3 1913.98,858.02 mcu.3
Netdebug_1: debug.1 mcu.28 | length 207.8
  Top Layer w6: mcu.28 2108.27,585.63 debug.1
Netdebug_2: debug.2 mcu.17 | length 627.7
  Top Layer w6: v1(1715,585) 1735.31,605.31 mcu.17
  Bottom Layer w6: v1(1715,585) 1755,585 1800,540 2040,540 2195,695 v1(2185,695)
Netdebug_3: debug.3 mcu.25 | length 570.1
  Top Layer w6: mcu.25 1913.98,521.02 v1(1915,520) ; debug.3 2170.79,745 v1(2265,745)
  Bottom Layer w6: v1(1915,520) 2040,520 v1(2265,745)
NetL1_2: L1.2 R26.2 | length 40.4
  Top Layer w12: L1.2 960,1435.31 R26.2
NetL3_2: L3.2 R24.2 | length 40.4
  Top Layer w12: L3.2 960.31,1760 R24.2
NetL5_2: L5.2 Q3.1 R16.1 | length 80.3
  Top Layer w12: L5.2 R16.1 Q3.1
Netmcu_4: mcu.4 R38.1 | length 201.9
  Top Layer w6: v1(1890,815) 1895,810 1895,778.27 mcu.4
  Bottom Layer w6: v1(1890,815) 2045,815 v1(2050,810)
Netmcu_35: mcu.35 R37.1 | length 87
  Top Layer w8: mcu.35 2058.43,723.43 R37.1
NetR2_2: R2.2 U1.47 | length 60.5
  Top Layer w10: R2.2 1206.42,1233.84 U1.47
RFIN: C16.2 U1.2 | length 68.1
  Top Layer w10: C16.2 1081.73,1118.58 U1.2
RSSI: C50.2 mcu.7 U1.18 | length 652.8
  Top Layer w8: C50.2 v1(1300.31,824.69) ; C50.2@1285.16,824.84 U1.18 ; mcu.7 v1@1835.24,808.63
  Signal Layer 1 w8: v1(1300.31,824.69) 1325,800 1820,800 1830,810 1830.68,809.32 v1(1834.55,809.32)
S: mcu.10 R10.1 U1.48 | length 1249.6
  Top Layer w6: v1(1695,758.9) 1695.87,758.9 1711.66,743.11 mcu.10
  Top Layer w10: R10.1 1186.73,1213.27 U1.48
  Signal Layer 1 w6: v1(1160,1235) 1165,1230 1165,796 1172,789 1217.87,789 1270,736.87 1270,691 1310,651 1587.1,651 1676,739.9 1676,740.77 1694.13,758.9 v1(1695,758.9)
SCL: mcu.8 P2.2 | length 1407.6
  Top Layer w6: v1(1735,830) 1730,825 1740,815 1805,815 1815.55,804.45 mcu.8
  Signal Layer 1 w6: v1(1735,830) 1751,846 1751,859.13 2210,1318.13 2210,1575 2155,1630 2100,1630 P2.2
SDA: mcu.9 P2.1 | length 1245.7
  Top Layer w6: v1(1705,820) 1747.44,777.56 mcu.9
  Signal Layer 1 w6: v1(1705,820) 1705,915 2000,1210 2000,1630 P2.1
SPI_CS: mcu.12 R12.2 U1.5 | length 1119.8
  Top Layer w6: v1(1695,706.9) 1698.16,703.74 mcu.12
  Top Layer w12: R12.2 1084.21,1059.53 U1.5
  Signal Layer 1 w6: v1(1070,1055) 1133,992 1133,765.13 1279.13,619 1607.1,619 1676,687.9 1676,688.77 1694.13,706.9 v1(1695,706.9)
SPI_SE: mcu.14 R14.2 U1.7 | length 1102.3
  Top Layer w6: v1(1695,654.9) 1695.87,654.9 1705.34,664.37 mcu.14
  Top Layer w12: R14.2 1078.66,980 1118.81,1020.16 U1.7
  Signal Layer 1 w6: v1(1061,987) 1101,947 1101,751.88 1265.88,587 1627.1,587 1676,635.9 1676,636.77 1694.13,654.9 v1(1695,654.9)
SPICLK: mcu.13 R13.2 U1.6 | length 1108.9
  Top Layer w6: v1(1695,680.9) 1698.16,684.06 mcu.13
  Top Layer w12: R13.2 1080,1015 1104.84,1039.84 U1.6
  Signal Layer 1 w6: v1(1065,1020) 1117,968 1117,758.5 1272.5,603 1617.1,603 1676,661.9 1676,662.77 1694.13,680.9 v1(1695,680.9)
SPIDATA: mcu.11 R11.2 U1.4 | length 1132.1
  Top Layer w6: v1(1695,732.9) 1695.87,732.9 1705.34,723.43 mcu.11
  Top Layer w12: R11.2 1080.47,1079.21 U1.4
  Signal Layer 1 w6: v1(1105,1090) 1149,1046 1149,774.13 1214.13,709 1242.87,709 1254,697.87 1254,684.37 1303.37,635 1597.1,635 1676,713.9 1676,714.77 1694.13,732.9 v1(1695,732.9)
VAMP_I: C11.2 R5.1 U1.35 | length 128.6
  Top Layer w10: U1.35 1488.27,1118.58 C11.2 1559.69,1145.31 R5.1
VAMP_O: R21.2 R23.1 U1.39 | length 947.9
  Top Layer w10: U1.39 1363.9,1141.1 v1(1365,1140) ; v1(1485,1365) 1820,1365 1840,1345 2009.69,1345 R21.2
  Top Layer w12: R21.2 2094.69,1385.31 R23.1
  Signal Layer 1 w10: v1(1365,1140) 1485,1260 v1(1485,1365)
VIDEO: C45.2 P1.2 R21.1 | length 105
  Top Layer w12: R21.1 P1.2
VT6: C42.1 U1.24 | length 126.4
  Top Layer w8: U1.24 1403.27,786.73 C42.1
VT65: U1.30
pads on no net: debug.shell LDO1.4 LDO2.4 LDO3.4 mcu.20 mcu.23 mcu.24 mcu.29 mcu.30 mcu.31 mcu.32 mcu.33 mcu.34 SW1.3 SW1.4 SW2.3 SW2.4 U1.13 U1.36 U1.38 U1.45

## Polygon pours and split planes (outlines as drawn)
GND on Bottom Layer "Top Layer-No Net" (solid, remove dead copper, pour order 2): 770,2235 2360,2235 2360,495 770,495
GND on Internal Plane 1 (split plane): 2339.9,515.1 790.1,515.1 790.1,2204.9 2339.9,2204.9

## Keep-outs
Keep-Out Layer:
  lines w10: 770,495 2360,495 2360,2235 770,2235 770,495